# EAGLE board RedBoard-Artemis-Panel (EAGLE 9.4.2), part 1 of 4
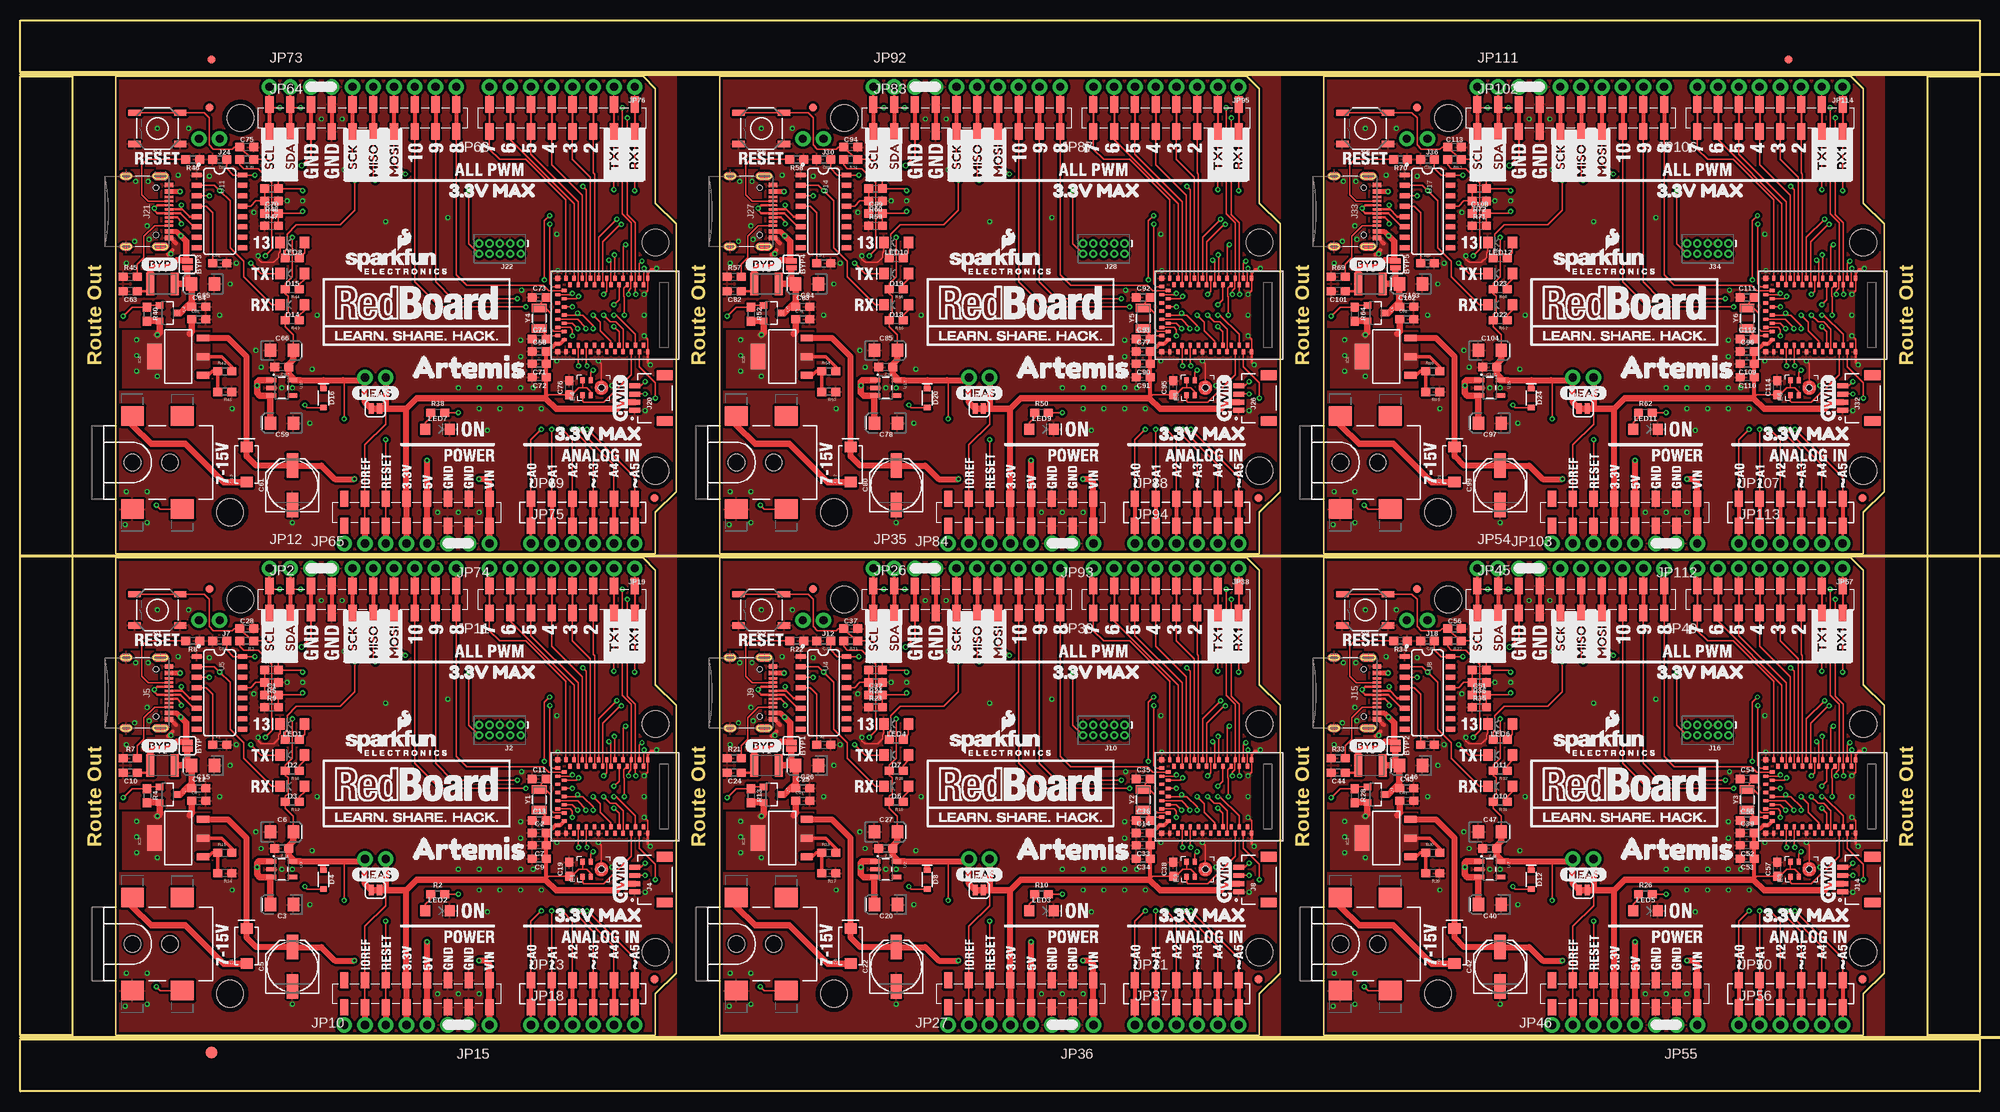
[diagram p0: board, top side]
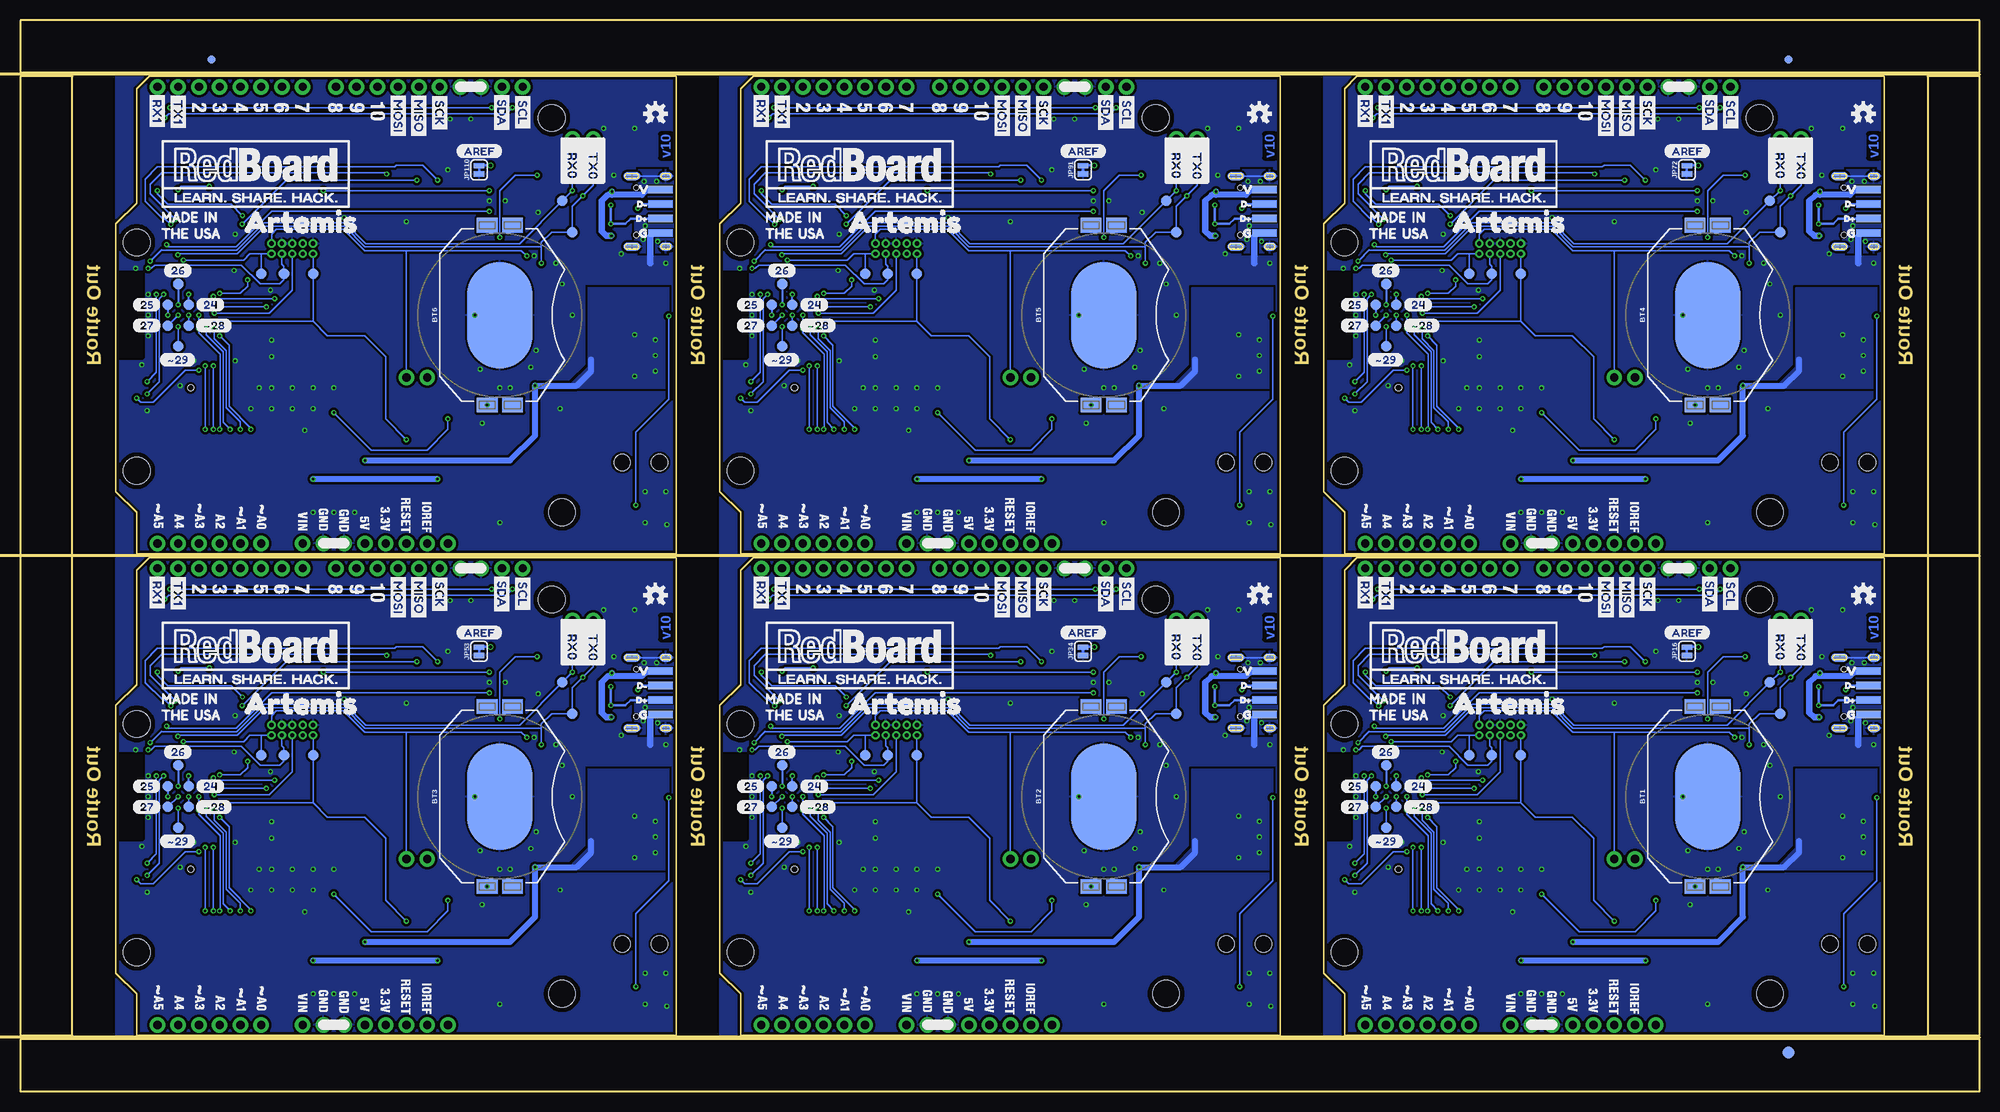
[diagram p1: board, bottom side, seen from below]

Size 239.78 x 131.06 mm. Coordinates in mm from the lower left corner, seen from the top.
Outline: 11.68,65.28 76.2,65.28 77.72,63.75 77.72,49.78 80.26,47.24 80.26,14.48 77.72,11.94 77.72,6.86 11.68,6.86 11.68,65.28
Outline: 85.6,65.28 150.11,65.28 151.64,63.75 151.64,49.78 154.18,47.24 154.18,14.48 151.64,11.94 151.64,6.86 85.6,6.86 85.6,65.28
Outline: 159.51,65.28 224.03,65.28 225.55,63.75 225.55,49.78 228.09,47.24 228.09,14.48 225.55,11.94 225.55,6.86 159.51,6.86 159.51,65.28
Outline: 11.68,124.21 76.2,124.21 77.72,122.68 77.72,108.71 80.26,106.17 80.26,73.41 77.72,70.87 77.72,65.79 11.68,65.79 11.68,124.21
Outline: 85.6,124.21 150.11,124.21 151.64,122.68 151.64,108.71 154.18,106.17 154.18,73.41 151.64,70.87 151.64,65.79 85.6,65.79 85.6,124.21
Outline: 159.51,124.21 224.03,124.21 225.55,122.68 225.55,108.71 228.09,106.17 228.09,73.41 225.55,70.87 225.55,65.79 159.51,65.79 159.51,124.21
Outline: 0,6.35 239.78,6.35 239.78,0 0,0 0,6.35
Outline: 233.43,124.21 239.78,124.21 239.78,6.86 233.43,6.86 233.43,124.21
Outline: 0,131.06 239.78,131.06 239.78,124.71 0,124.71 0,131.06
Outline: 0,124.21 6.35,124.21 6.35,6.86 0,6.86 0,124.21
Copper layers (1*16): Top 0.035mm / dielectric 1.5mm / Bottom 0.035mm
Design rules "SparkFun-2-layer-PCBWay-LIMIT": minimum track width 6mil, minimum drill 0.3mm, track to track 6mil, track to pad 6mil, pad to pad 6mil, via to via 6mil, smd to smd 6mil, copper to edge 6mil, drill to drill 6mil, minimum pad ring 6mil, minimum via ring 6mil, stop-mask expansion 4mil, vias tented up to drill 25mil, thermal gap 10mil
Net classes: 0 default: width 0 mm, drill 0 mm; 1 power: width 0.762 mm
tRestrict: area 77.1,31 to 80.3,41.1; area 151,31 to 154.2,41.1; area 224.9,31 to 228.1,41.1; area 77.1,89.9 to 80.3,100.1; area 151,89.9 to 154.2,100.1; area 224.9,89.9 to 228.1,100.1
bRestrict: area 77.1,31 to 80.3,41.1; area 151,31 to 154.2,41.1; area 224.9,31 to 228.1,41.1; area 77.1,89.9 to 80.3,100.1; area 151,89.9 to 154.2,100.1; area 224.9,89.9 to 228.1,100.1
vRestrict: area 12.3,29.2 to 13.7,37.5; area 17.4,30 to 19,37.5; area 59.6,17.7 to 60.2,18.2; area 62.1,17.5 to 62.6,18.4; area 23,36.2 to 24.4,38.5; area 11.9,19.8 to 21.1,31.9; area 86.2,29.2 to 87.6,37.5; area 91.3,30 to 93,37.5; area 133.5,17.7 to 134.1,18.2; area 136,17.5 to 136.5,18.4; area 96.9,36.2 to 98.3,38.5; area 85.9,19.8 to 95,31.9; area 160.1,29.2 to 161.5,37.5; area 165.2,30 to 166.9,37.5; area 207.4,17.7 to 208,18.2; area 209.9,17.5 to 210.4,18.4; area 170.8,36.2 to 172.2,38.5; area 159.8,19.8 to 168.9,31.9; area 12.3,88.1 to 13.7,96.4; area 17.4,88.9 to 19,96.4; area 59.6,76.6 to 60.2,77.1; area 62.1,76.5 to 62.6,77.3; area 23,95.1 to 24.4,97.4; area 11.9,78.7 to 21.1,90.8; area 86.2,88.1 to 87.6,96.4; area 91.3,88.9 to 93,96.4; area 133.5,76.6 to 134.1,77.1; area 136,76.5 to 136.5,77.3; area 96.9,95.1 to 98.3,97.4; area 85.9,78.7 to 95,90.8; area 160.1,88.1 to 161.5,96.4; area 165.2,88.9 to 166.9,96.4; area 207.4,76.6 to 208,77.1; area 209.9,76.5 to 210.4,77.3; area 170.8,95.1 to 172.2,97.4; area 159.8,78.7 to 168.9,90.8
Milling: 3 lines

## Footprints (pad centres in the part's own frame; a part is rotated, then mirrored left to right if it is on the bottom)
BATTCON_20MM_4LEGS_OVERPASTE = smd 1.778 x 2.54: 1 -11,1.55; 3 11,1.55; P$1 -11,-1.55; P$2 11,-1.55 | smd 13 x 8: 2 0,0
SMT-JUMPER_2_NO_SILK = smd 0.635 x 1.27: 1 -0.406,0; 2 0.406,0
0603 = smd 1.1 x 1: 1 -0.85,0; 2 0.85,0
EIA3216 = smd 1.4 x 1.6: + 1.4,0; - -1.4,0
PANASONIC_D = smd 3 x 1.4: + 2.4,0; - -2.4,0
SMA-DIODE = smd 1.27 x 1.47: A -2.15,0; C 2.15,0
LED-1206 = smd 1.2 x 1.4: A -1.5,0; C 1.5,0
SOD-323 = smd 0.63 x 0.83: A 1.15,0; C -1.15,0
SPH0641LM4H-1_MICROPHONE = smd 0.725 x 0.522: 1 -0.9,1.3; 2 -0.9,0.3; 4 0.9,0.3; 5 0.9,1.3 | smd 0.5 x 0.2: 3 0,-1.65; 8 0,-0.35 | smd 0.2 x 0.5: 6 -0.65,-1; 7 0.65,-1 | hole 0.8: 0,-1
FIDUCIAL-1X2 = smd 1 x 1: 1 0,0
FIDUCIAL-1.5X3 = smd 1.5 x 1.5: 1 0,0
1210 = smd 1 x 2.8: 1 -1.5,0; 2 1.5,0
SOT223-ALT1 = smd 0.838 x 1.524: 1 -2.271,-3.02; 2 0,-3.02; 3 2.288,-3.02 | smd 3.124 x 1.778: 4 0,2.921
1X02_NO_SILK = drill 1.016 pad 1.88: 1 0,0; 2 2.54,0
2X5-PTH-1.27MM-NO_SILK = drill 0.508 pad 1: 1 -2.54,-0.635; 2 -2.54,0.635; 3 -1.27,-0.635; 4 -1.27,0.635; 5 0,-0.635; 6 0,0.635; 7 1.27,-0.635; 8 1.27,0.635; 9 2.54,-0.635; 10 2.54,0.635
POWER_JACK_SMD_OVERPASTE_TOE = smd 2.8 x 2.4: GND 0,-5.7; P$4 6.1,-5.7; VIN0 0,5.7; VIN1 6.1,5.7 | hole 2.032: 0,0; 4.572,0
JST04_1MM_RA = smd 0.6 x 1.35: 1 -1.5,0; 2 -0.5,0; 3 0.5,0; 4 1.5,0 | smd 1.2 x 2: NC1 2.8,-3.675; NC2 -2.8,-3.675
USB-C-16P = smd 0.3 x 1.016: A5 -1.25,0.154; A6 -0.25,0.154; A7 0.25,0.154; A8 1.25,0.154; B5 1.75,0.154; B6 0.75,0.154; B7 -0.75,0.154; B8 -1.75,0.154 | smd 0.6 x 1.016: GND -3.225,0.154; GND2 3.225,0.154 | smd 1 x 2.1: SHLD1 -4.32,-0.915; SHLD2 4.32,-0.915 | smd 1 x 2.1 bottom: SHLD3 -4.32,-0.915; SHLD4 4.32,-0.915 | smd 1 x 1.6: SHLD5 -4.32,-5.095; SHLD8 4.32,-5.095 | smd 1 x 1.6 bottom: SHLD6 -4.32,-5.095; SHLD7 4.32,-5.095 | smd 0.55 x 1.016: VBUS1 -2.45,0.154; VBUS2 2.45,0.154 | hole 0.65: -2.89,-1.445; 2.89,-1.445
1X10_SMD_COMBINED = smd 1 x 2: 1A 0,1.65; 1B 0,-1.65; 2A 2.54,1.65; 2B 2.54,-1.65; 3A 5.08,1.65; 3B 5.08,-1.65; 4A 7.62,1.65; 4B 7.62,-1.65; 5A 10.16,1.65; 5B 10.16,-1.65; 6A 12.7,1.65; 6B 12.7,-1.65; 7A 15.24,1.65; 7B 15.24,-1.65; 8A 17.78,1.65; 8B 17.78,-1.65; 9A 20.32,1.65; 9B 20.32,-1.65; 10A 22.86,1.65; 10B 22.86,-1.65
STAND-OFF = hole 3.302: 0,0
1X08_SMD_COMBINED_NC = smd 1 x 2: 1 -17.78,1.65; 1@2 -17.78,-1.65; 2 -15.24,-1.65; 2@2 -15.24,1.65; 3 -12.7,1.65; 3@2 -12.7,-1.65; 4 -10.16,-1.65; 4@2 -10.16,1.65; 5 -7.62,1.65; 5@2 -7.62,-1.65; 6 -5.08,-1.65; 6@2 -5.08,1.65; 7 -2.54,1.65; 7@2 -2.54,-1.65; 8 0,-1.65; 8@2 0,1.65
1X10_NO_SILK = drill 1.016 pad 1.88: 1 0,0; 2 2.54,0; 3 5.08,0; 4 7.62,0; 5 10.16,0; 6 12.7,0; 7 15.24,0; 8 17.78,0; 9 20.32,0; 10 22.86,0
1X06_SMD_STRAIGHT_COMBO = smd 1 x 2: 1A 0,-1.65; 1B 0,1.65; 2A 2.54,1.65; 2B 2.54,-1.65; 3A 5.08,-1.65; 3B 5.08,1.65; 4A 7.62,1.65; 4B 7.62,-1.65; 5A 10.16,-1.65; 5B 10.16,1.65; 6A 12.7,1.65; 6B 12.7,-1.65
USB-SOLDER-PADS = smd 3 x 0.9: D+ 0,-0.889; D- 0,0.889; GND 0,-2.667; VBUS 0,2.667
1X08_NO_SILK@1 = drill 1.016 pad 1.88: 1 0,0; 2 2.54,0; 3 5.08,0; 4 7.62,0; 5 10.16,0; 6 12.7,0; 7 15.24,0; 8 17.78,0
SMT-JUMPER_2_NC_TRACE_SILK = smd 0.635 x 1.27: 1 -0.508,0; 2 0.508,0
1X06_NO_SILK@1 = drill 1.016 pad 1.88: 1 0,0; 2 2.54,0; 3 5.08,0; 4 7.62,0; 5 10.16,0; 6 12.7,0
1X08_NO_SILK = drill 1.016 pad 1.88: 1 0,0; 2 2.54,0; 3 5.08,0; 4 7.62,0; 5 10.16,0; 6 12.7,0; 7 15.24,0; 8 17.78,0
SOT23-3 = smd 0.8 x 0.9: 1 -0.95,-1; 2 0.95,-1; 3 0,1.1
TACTILE_SWITCH_SMD_5.2MM = smd 1.524 x 0.762: 1 -2.794,1.905; 2 2.794,1.905; 3 -2.794,-1.905; 4 2.794,-1.905
PAD.03X.05 = smd 1.27 x 1.27: P$1 0,0
ARTEMIS_FP = smd 0.4 x 0.6: AD16 -4,-3.7; BOOT 1.5,4.5; D0 0.5,-4.5; D1 -0.5,-4.5; D2 -1,-3.7; D3 2,-3.7; D7 -1.5,4.5; D8 -0.5,4.5; D9 2,3.7; D10 1,3.7; D14 -5,3.7; D17 -3.5,-4.5; D36 2.5,-4.5; D38 3,-3.7; D40 2.5,4.5; D41 -2.5,-4.5; GND@1 4.5,4.5; GND@39 -5.5,-4.5; GND@47 -1.5,-4.5; GND@59 4.5,-4.5; RXI-0 3.5,4.5; SWDCK 4,3.7; SWDIO 0,3.7; TXO-0 0.5,4.5; ~AD31 -3,-3.7; ~AD35 -2,3.7; ~D4 -2.5,4.5; ~D5 -1,3.7; ~D18 -4.5,-4.5; ~D19 -5,-3.7; ~D22 -3.5,4.5; ~D23 -4,3.7; ~D24 -3,3.7; ~D27 -4.5,4.5; ~D28 -5.5,4.5; ~D37 3.5,-4.5; ~D39 3,3.7; ~D42 1.5,-4.5; ~D43 1,-3.7; ~D44 4,-3.7; ~D45 -2,-3.7; ~RST 0,-3.7 | smd 0.6 x 0.4: AD34 -6.5,-0.5; D15 -6.5,0.5; VDD@36 -5.7,-3; VDD@37 -6.5,-3.5; XI -6.5,-2.5; XO -5.7,-2; ~AD11 -5.7,-1; ~AD12 -5.7,2; ~AD13 -5.7,1; ~AD29 -6.5,-1.5; ~AD32 -5.7,3; ~AD33/SWO -5.7,0; ~D6 -6.5,3.5; ~D25 -6.5,2.5; ~D26 -6.5,1.5 | smd 0.6 x 0.6: GND@22 -6.5,4.5; GND@38 -6.5,-4.5
SOT23-5 = smd 0.55 x 1.2: 1 -0.95,-1.3; 2 0,-1.3; 3 0.95,-1.3; 4 0.95,1.3; 5 -0.95,1.3
SO016 = smd 0.6 x 1.2: 1 -4.445,-2.8; 2 -3.175,-2.8; 3 -1.905,-2.8; 4 -0.635,-2.8; 5 0.635,-2.8; 6 1.905,-2.8; 7 3.175,-2.8; 8 4.445,-2.8; 9 4.445,2.8; 10 3.175,2.8; 11 1.905,2.8; 12 0.635,2.8; 13 -0.635,2.8; 14 -1.905,2.8; 15 -3.175,2.8; 16 -4.445,2.8
CRYSTAL-SMD-3.2X1.5MM = smd 1 x 1.8: P$1 -1.25,0; P$2 1.25,0

## Placement (x,y rotation side)
BT1  CR2032  [BATTCON_20MM_4LEGS_OVERPASTE]  33.27,36.07 90 bottom
BT2  CR2032  [BATTCON_20MM_4LEGS_OVERPASTE]  107.19,36.07 90 bottom
BT3  CR2032  [BATTCON_20MM_4LEGS_OVERPASTE]  181.1,36.07 90 bottom
BT4  CR2032  [BATTCON_20MM_4LEGS_OVERPASTE]  33.27,95 90 bottom
BT5  CR2032  [BATTCON_20MM_4LEGS_OVERPASTE]  107.19,95 90 bottom
BT6  CR2032  [BATTCON_20MM_4LEGS_OVERPASTE]  181.1,95 90 bottom
BYP  [SMT-JUMPER_2_NO_SILK]  20.45,42.29 270 top
BYP1  [SMT-JUMPER_2_NO_SILK]  94.36,42.29 270 top
BYP2  [SMT-JUMPER_2_NO_SILK]  168.28,42.29 270 top
BYP3  [SMT-JUMPER_2_NO_SILK]  20.45,101.22 270 top
BYP4  [SMT-JUMPER_2_NO_SILK]  94.36,101.22 270 top
BYP5  [SMT-JUMPER_2_NO_SILK]  168.28,101.22 270 top
C1  0.1uF  [0603]  30.73,48.51 0 top
C2  0.1uF  [0603]  63.5,31.62 0 top
C3  10uF  [EIA3216]  32,22.86 180 top
C4  0.1uF  [0603]  21.84,35.56 0 top
C5  47uF  [PANASONIC_D]  33.27,15.24 90 top
C6  10uF  [EIA3216]  32,31.75 0 top
C7  10uF  [0603]  63.5,30.1 180 top
C8  0.1uF  [0603]  30.73,51.56 0 top
C9  1.0uF  [0603]  63.5,28.45 180 top
C10  0.1uF  [0603]  13.46,38.99 180 top
C11  15pF  [0603]  63.5,38.23 0 top
C12  0.1uF  [0603]  21.84,37.08 0 top
C13  15pF  [0603]  63.5,33.15 0 top
C14  0.1uF  [0603]  137.41,31.62 0 top
C15  10uF  [EIA3216]  22.35,39.88 180 top
C16  1.0uF  [0603]  32,29.72 180 top
C17  10nF  [0603]  24.38,42.42 0 top
C18  0.1uF  [0603]  24.38,55.12 180 top
C19  0.1uF  [0603]  67.18,27.18 90 top
C20  10uF  [EIA3216]  105.92,22.86 180 top
C21  0.1uF  [0603]  95.76,35.56 0 top
C22  47uF  [PANASONIC_D]  107.19,15.24 90 top
C23  0.1uF  [0603]  104.65,51.56 0 top
C24  0.1uF  [0603]  87.38,38.99 180 top
C25  0.1uF  [0603]  95.76,37.08 0 top
C26  10uF  [EIA3216]  96.27,39.88 180 top
C27  10uF  [EIA3216]  105.92,31.75 0 top
C28  1nF  [0603]  27.69,56.64 0 top
C29  1.0uF  [0603]  105.92,29.72 180 top
C30  10nF  [0603]  98.3,42.42 0 top
C31  0.1uF  [0603]  98.3,55.12 180 top
C32  0.1uF  [0603]  104.65,48.51 0 top
C33  10uF  [0603]  137.41,30.1 180 top
C34  1.0uF  [0603]  137.41,28.45 180 top
C35  15pF  [0603]  137.41,38.23 0 top
C36  15pF  [0603]  137.41,33.15 0 top
C37  1nF  [0603]  101.6,56.64 0 top
C38  0.1uF  [0603]  141.1,27.18 90 top
C39  0.1uF  [0603]  211.33,31.62 0 top
C40  10uF  [EIA3216]  179.83,22.86 180 top
C41  0.1uF  [0603]  169.67,35.56 0 top
C42  47uF  [PANASONIC_D]  181.1,15.24 90 top
C43  0.1uF  [0603]  178.56,51.56 0 top
C44  0.1uF  [0603]  161.29,38.99 180 top
C45  0.1uF  [0603]  169.67,37.08 0 top
C46  10uF  [EIA3216]  170.18,39.88 180 top
C47  10uF  [EIA3216]  179.83,31.75 0 top
C48  1.0uF  [0603]  179.83,29.72 180 top
C49  10nF  [0603]  172.21,42.42 0 top
C50  0.1uF  [0603]  172.21,55.12 180 top
C51  0.1uF  [0603]  178.56,48.51 0 top
C52  10uF  [0603]  211.33,30.1 180 top
C53  1.0uF  [0603]  211.33,28.45 180 top
C54  15pF  [0603]  211.33,38.23 0 top
C55  15pF  [0603]  211.33,33.15 0 top
C56  1nF  [0603]  175.51,56.64 0 top
C57  0.1uF  [0603]  215.01,27.18 90 top
C58  0.1uF  [0603]  63.5,90.55 0 top
C59  10uF  [EIA3216]  32,81.79 180 top
C60  0.1uF  [0603]  21.84,94.49 0 top
C61  47uF  [PANASONIC_D]  33.27,74.17 90 top
C62  0.1uF  [0603]  30.73,110.49 0 top
C63  0.1uF  [0603]  13.46,97.92 180 top
C64  0.1uF  [0603]  21.84,96.01 0 top
C65  10uF  [EIA3216]  22.35,98.81 180 top
C66  10uF  [EIA3216]  32,90.68 0 top
C67  1.0uF  [0603]  32,88.65 180 top
C68  10nF  [0603]  24.38,101.35 0 top
C69  0.1uF  [0603]  24.38,114.05 180 top
C70  0.1uF  [0603]  30.73,107.44 0 top
C71  10uF  [0603]  63.5,89.03 180 top
C72  1.0uF  [0603]  63.5,87.38 180 top
C73  15pF  [0603]  63.5,97.16 0 top
C74  15pF  [0603]  63.5,92.08 0 top
C75  1nF  [0603]  27.69,115.57 0 top
C76  0.1uF  [0603]  67.18,86.11 90 top
C77  0.1uF  [0603]  137.41,90.55 0 top
C78  10uF  [EIA3216]  105.92,81.79 180 top
C79  0.1uF  [0603]  95.76,94.49 0 top
C80  47uF  [PANASONIC_D]  107.19,74.17 90 top
C81  0.1uF  [0603]  104.65,110.49 0 top
C82  0.1uF  [0603]  87.38,97.92 180 top
C83  0.1uF  [0603]  95.76,96.01 0 top
C84  10uF  [EIA3216]  96.27,98.81 180 top
C85  10uF  [EIA3216]  105.92,90.68 0 top
C86  1.0uF  [0603]  105.92,88.65 180 top
C87  10nF  [0603]  98.3,101.35 0 top
C88  0.1uF  [0603]  98.3,114.05 180 top
C89  0.1uF  [0603]  104.65,107.44 0 top
C90  10uF  [0603]  137.41,89.03 180 top
C91  1.0uF  [0603]  137.41,87.38 180 top
C92  15pF  [0603]  137.41,97.16 0 top
C93  15pF  [0603]  137.41,92.08 0 top
C94  1nF  [0603]  101.6,115.57 0 top
C95  0.1uF  [0603]  141.1,86.11 90 top
C96  0.1uF  [0603]  211.33,90.55 0 top
C97  10uF  [EIA3216]  179.83,81.79 180 top
C98  0.1uF  [0603]  169.67,94.49 0 top
C99  47uF  [PANASONIC_D]  181.1,74.17 90 top
C100  0.1uF  [0603]  178.56,110.49 0 top
C101  0.1uF  [0603]  161.29,97.92 180 top
C102  0.1uF  [0603]  169.67,96.01 0 top
C103  10uF  [EIA3216]  170.18,98.81 180 top
C104  10uF  [EIA3216]  179.83,90.68 0 top
C105  1.0uF  [0603]  179.83,88.65 180 top
C106  10nF  [0603]  172.21,101.35 0 top
C107  0.1uF  [0603]  172.21,114.05 180 top
C108  0.1uF  [0603]  178.56,107.44 0 top
C109  10uF  [0603]  211.33,89.03 180 top
C110  1.0uF  [0603]  211.33,87.38 180 top
C111  15pF  [0603]  211.33,97.16 0 top
C112  15pF  [0603]  211.33,92.08 0 top
C113  1nF  [0603]  175.51,115.57 0 top
C114  0.1uF  [0603]  215.01,86.11 90 top
D1  1A/40V/500mV  [SMA-DIODE]  27.69,17.78 90 top
D2  GREEN  [LED-1206]  33.27,41.15 180 top
D3  Yellow  [LED-1206]  33.27,37.34 180 top
D4  3A/10V/280mV  [SOD-323]  37.08,25.91 270 top
D5  1A/40V/500mV  [SMA-DIODE]  101.6,17.78 90 top
D6  Yellow  [LED-1206]  107.19,37.34 180 top
D7  GREEN  [LED-1206]  107.19,41.15 180 top
D8  3A/10V/280mV  [SOD-323]  111,25.91 270 top
D9  1A/40V/500mV  [SMA-DIODE]  175.51,17.78 90 top
D10  Yellow  [LED-1206]  181.1,37.34 180 top
D11  GREEN  [LED-1206]  181.1,41.15 180 top
D12  3A/10V/280mV  [SOD-323]  184.91,25.91 270 top
D13  1A/40V/500mV  [SMA-DIODE]  27.69,76.71 90 top
D14  Yellow  [LED-1206]  33.27,96.27 180 top
D15  GREEN  [LED-1206]  33.27,100.08 180 top
D16  3A/10V/280mV  [SOD-323]  37.08,84.84 270 top
D17  1A/40V/500mV  [SMA-DIODE]  101.6,76.71 90 top
D18  Yellow  [LED-1206]  107.19,96.27 180 top
D19  GREEN  [LED-1206]  107.19,100.08 180 top
D20  3A/10V/280mV  [SOD-323]  111,84.84 270 top
D21  1A/40V/500mV  [SMA-DIODE]  175.51,76.71 90 top
D22  Yellow  [LED-1206]  181.1,96.27 180 top
D23  GREEN  [LED-1206]  181.1,100.08 180 top
D24  3A/10V/280mV  [SOD-323]  184.91,84.84 270 top
E1  SPH0641LM4H-1  [SPH0641LM4H-1_MICROPHONE]  70.1,27.18 90 top
E2  SPH0641LM4H-1  [SPH0641LM4H-1_MICROPHONE]  144.02,27.18 90 top
E3  SPH0641LM4H-1  [SPH0641LM4H-1_MICROPHONE]  217.93,27.18 90 top
E4  SPH0641LM4H-1  [SPH0641LM4H-1_MICROPHONE]  70.1,86.11 90 top
E5  SPH0641LM4H-1  [SPH0641LM4H-1_MICROPHONE]  144.02,86.11 90 top
E6  SPH0641LM4H-1  [SPH0641LM4H-1_MICROPHONE]  217.93,86.11 90 top
E$1  [FIDUCIAL-1X2]  23.37,126.3 0 top
E$2  [FIDUCIAL-1X2]  23.37,126.3 0 bottom
E$3  [FIDUCIAL-1X2]  216.41,126.3 0 top
E$4  [FIDUCIAL-1X2]  216.41,126.3 0 bottom
E$5  [FIDUCIAL-1.5X3]  23.37,4.76 0 top
E$6  [FIDUCIAL-1.5X3]  23.37,4.76 0 bottom
F1  6V/2A  [1210]  91.31,39.88 0 top
F2  6V/2A  [1210]  17.4,39.88 0 top
F3  6V/2A  [1210]  165.23,39.88 0 top
F4  6V/2A  [1210]  17.4,98.81 0 top
F5  6V/2A  [1210]  91.31,98.81 0 top
F6  6V/2A  [1210]  165.23,98.81 0 top
FRAME1  FRAME-LETTERNO_PACKAGE  [DUMMY]  122.43,30.99 270 bottom
FRAME2  FRAME-LETTERNO_PACKAGE  [DUMMY]  48.51,30.99 270 bottom
FRAME3  FRAME-LETTERNO_PACKAGE  [DUMMY]  196.34,30.99 270 bottom
FRAME4  FRAME-LETTERNO_PACKAGE  [DUMMY]  48.51,89.92 270 bottom
FRAME5  FRAME-LETTERNO_PACKAGE  [DUMMY]  122.43,89.92 270 bottom
FRAME6  FRAME-LETTERNO_PACKAGE  [DUMMY]  196.34,89.92 270 bottom
IC1  LM1117  [SOT223-ALT1]  93.22,30.99 90 top
IC2  LM1117  [SOT223-ALT1]  167.13,30.99 90 top
IC3  LM1117  [SOT223-ALT1]  19.3,30.99 90 top
IC4  LM1117  [SOT223-ALT1]  19.3,89.92 90 top
IC5  LM1117  [SOT223-ALT1]  93.22,89.92 90 top
IC6  LM1117  [SOT223-ALT1]  167.13,89.92 90 top
J1  [1X02_NO_SILK]  44.7,28.45 180 top
J2  CORTEX_DEBUG  [2X5-PTH-1.27MM-NO_SILK]  58.67,44.2 180 top
J3  POWER_JACKTOE  [POWER_JACK_SMD_OVERPASTE_TOE]  13.72,18.03 0 top
J4  [JST04_1MM_RA]  75.18,25.91 90 top
J5  USB-C  [USB-C-16P]  18.03,48.77 270 top
J6  POWER_JACKTOE  [POWER_JACK_SMD_OVERPASTE_TOE]  87.63,18.03 0 top
J7  [1X02_NO_SILK]  24.38,57.66 180 top
J8  [JST04_1MM_RA]  149.1,25.91 90 top
J9  USB-C  [USB-C-16P]  91.95,48.77 270 top
J10  CORTEX_DEBUG  [2X5-PTH-1.27MM-NO_SILK]  132.59,44.2 180 top
J11  [1X02_NO_SILK]  118.62,28.45 180 top
J12  [1X02_NO_SILK]  98.3,57.66 180 top
J13  POWER_JACKTOE  [POWER_JACK_SMD_OVERPASTE_TOE]  161.54,18.03 0 top
J14  [JST04_1MM_RA]  223.01,25.91 90 top
J15  USB-C  [USB-C-16P]  165.86,48.77 270 top
J16  CORTEX_DEBUG  [2X5-PTH-1.27MM-NO_SILK]  206.5,44.2 180 top
J17  [1X02_NO_SILK]  192.53,28.45 180 top
J18  [1X02_NO_SILK]  172.21,57.66 180 top
J19  POWER_JACKTOE  [POWER_JACK_SMD_OVERPASTE_TOE]  13.72,76.96 0 top
J20  [JST04_1MM_RA]  75.18,84.84 90 top
J21  USB-C  [USB-C-16P]  18.03,107.7 270 top
J22  CORTEX_DEBUG  [2X5-PTH-1.27MM-NO_SILK]  58.67,103.12 180 top
J23  [1X02_NO_SILK]  44.7,87.38 180 top
J24  [1X02_NO_SILK]  24.38,116.59 180 top
J25  POWER_JACKTOE  [POWER_JACK_SMD_OVERPASTE_TOE]  87.63,76.96 0 top
J26  [JST04_1MM_RA]  149.1,84.84 90 top
J27  USB-C  [USB-C-16P]  91.95,107.7 270 top
J28  CORTEX_DEBUG  [2X5-PTH-1.27MM-NO_SILK]  132.59,103.12 180 top
J29  [1X02_NO_SILK]  118.62,87.38 180 top
J30  [1X02_NO_SILK]  98.3,116.59 180 top
J31  POWER_JACKTOE  [POWER_JACK_SMD_OVERPASTE_TOE]  161.54,76.96 0 top
J32  [JST04_1MM_RA]  223.01,84.84 90 top
J33  USB-C  [USB-C-16P]  165.86,107.7 270 top
J34  CORTEX_DEBUG  [2X5-PTH-1.27MM-NO_SILK]  206.5,103.12 180 top
J35  [1X02_NO_SILK]  192.53,87.38 180 top
J36  [1X02_NO_SILK]  172.21,116.59 180 top
JP1  SFE_LOGO_NAME.1_INCH  [SFE_LOGO_NAME_.1]  45.34,42.8 0 top
JP2  M10SMD_COMBO  [1X10_SMD_COMBINED]  30.48,60.2 0 top
JP3  STAND-OFF  [STAND-OFF]  25.65,11.94 0 top
JP4  STAND-OFF  [STAND-OFF]  77.72,17.02 0 top
JP5  STAND-OFF  [STAND-OFF]  77.72,44.96 0 top
JP6  STAND-OFF  [STAND-OFF]  26.92,60.2 0 top
JP7  SFE_LOGO_FLAME.1_INCH  [SFE_LOGO_FLAME_.1]  46.99,45.34 0 top
JP8  FIDUCIAL1X2  [FIDUCIAL-1X2]  77.6,13.72 0 top
JP9  FIDUCIAL1X2  [FIDUCIAL-1X2]  23.11,61.47 0 top
JP10  [1X08_SMD_COMBINED_NC]  39.62,11.94 180 top
JP11  JP11  [1X08_SMD_COMBINED_NC]  57.4,60.2 180 top
JP12  M10NO_SILK  [1X10_NO_SILK]  30.48,64.01 0 top
JP13  [1X06_SMD_STRAIGHT_COMBO]  62.48,11.94 0 top
JP14  USB_SOLDER_PADS  [USB-SOLDER-PADS]  13.59,48.77 0 bottom
JP15  [1X08_NO_SILK@1]  57.4,8.13 180 top
JP16  [SMT-JUMPER_2_NC_TRACE_SILK]  35.81,53.85 90 bottom
JP17  MEAS  [SMT-JUMPER_2_NC_TRACE_SILK]  43.43,24.64 0 top
JP18  [1X06_NO_SILK@1]  62.48,8.13 0 top
JP19  [1X08_NO_SILK]  75.18,64.01 180 top
JP20  STAND-OFF  [STAND-OFF]  99.57,11.94 0 top
JP21  STAND-OFF  [STAND-OFF]  151.64,17.02 0 top
JP22  STAND-OFF  [STAND-OFF]  151.64,44.96 0 top
JP23  STAND-OFF  [STAND-OFF]  100.84,60.2 0 top
JP24  FIDUCIAL1X2  [FIDUCIAL-1X2]  151.51,13.72 0 top
JP25  FIDUCIAL1X2  [FIDUCIAL-1X2]  97.03,61.47 0 top
JP26  M10SMD_COMBO  [1X10_SMD_COMBINED]  104.39,60.2 0 top
JP27  [1X08_SMD_COMBINED_NC]  113.54,11.94 180 top
JP28  SFE_LOGO_NAME.1_INCH  [SFE_LOGO_NAME_.1]  119.25,42.8 0 top
JP29  SFE_LOGO_FLAME.1_INCH  [SFE_LOGO_FLAME_.1]  120.9,45.34 0 top
JP30  JP11  [1X08_SMD_COMBINED_NC]  131.32,60.2 180 top
JP31  [1X06_SMD_STRAIGHT_COMBO]  136.4,11.94 0 top
JP32  USB_SOLDER_PADS  [USB-SOLDER-PADS]  87.5,48.77 0 bottom
JP33  MEAS  [SMT-JUMPER_2_NC_TRACE_SILK]  117.35,24.64 0 top
JP34  [SMT-JUMPER_2_NC_TRACE_SILK]  109.73,53.85 90 bottom
JP35  M10NO_SILK  [1X10_NO_SILK]  104.39,64.01 0 top
JP36  [1X08_NO_SILK@1]  131.32,8.13 180 top
JP37  [1X06_NO_SILK@1]  136.4,8.13 0 top
JP38  [1X08_NO_SILK]  149.1,64.01 180 top
JP39  STAND-OFF  [STAND-OFF]  173.48,11.94 0 top
JP40  STAND-OFF  [STAND-OFF]  225.55,17.02 0 top
JP41  STAND-OFF  [STAND-OFF]  225.55,44.96 0 top
JP42  STAND-OFF  [STAND-OFF]  174.75,60.2 0 top
JP43  FIDUCIAL1X2  [FIDUCIAL-1X2]  225.43,13.72 0 top
JP44  FIDUCIAL1X2  [FIDUCIAL-1X2]  170.94,61.47 0 top
JP45  M10SMD_COMBO  [1X10_SMD_COMBINED]  178.31,60.2 0 top
JP46  [1X08_SMD_COMBINED_NC]  187.45,11.94 180 top
JP47  SFE_LOGO_NAME.1_INCH  [SFE_LOGO_NAME_.1]  193.17,42.8 0 top
JP48  SFE_LOGO_FLAME.1_INCH  [SFE_LOGO_FLAME_.1]  194.82,45.34 0 top
JP49  JP11  [1X08_SMD_COMBINED_NC]  205.23,60.2 180 top
JP50  [1X06_SMD_STRAIGHT_COMBO]  210.31,11.94 0 top
JP51  USB_SOLDER_PADS  [USB-SOLDER-PADS]  161.42,48.77 0 bottom
JP52  MEAS  [SMT-JUMPER_2_NC_TRACE_SILK]  191.26,24.64 0 top
JP53  [SMT-JUMPER_2_NC_TRACE_SILK]  183.64,53.85 90 bottom
JP54  M10NO_SILK  [1X10_NO_SILK]  178.31,64.01 0 top
JP55  [1X08_NO_SILK@1]  205.23,8.13 180 top
JP56  [1X06_NO_SILK@1]  210.31,8.13 0 top
JP57  [1X08_NO_SILK]  223.01,64.01 180 top
JP58  STAND-OFF  [STAND-OFF]  25.65,70.87 0 top
JP59  STAND-OFF  [STAND-OFF]  77.72,75.95 0 top
JP60  STAND-OFF  [STAND-OFF]  77.72,103.89 0 top
JP61  STAND-OFF  [STAND-OFF]  26.92,119.13 0 top
JP62  FIDUCIAL1X2  [FIDUCIAL-1X2]  77.6,72.64 0 top
JP63  FIDUCIAL1X2  [FIDUCIAL-1X2]  23.11,120.4 0 top
JP64  M10SMD_COMBO  [1X10_SMD_COMBINED]  30.48,119.13 0 top
JP65  [1X08_SMD_COMBINED_NC]  39.62,70.87 180 top
JP66  SFE_LOGO_NAME.1_INCH  [SFE_LOGO_NAME_.1]  45.34,101.73 0 top
JP67  SFE_LOGO_FLAME.1_INCH  [SFE_LOGO_FLAME_.1]  46.99,104.27 0 top
JP68  JP11  [1X08_SMD_COMBINED_NC]  57.4,119.13 180 top
JP69  [1X06_SMD_STRAIGHT_COMBO]  62.48,70.87 0 top
JP70  USB_SOLDER_PADS  [USB-SOLDER-PADS]  13.59,107.7 0 bottom
JP71  MEAS  [SMT-JUMPER_2_NC_TRACE_SILK]  43.43,83.57 0 top
JP72  [SMT-JUMPER_2_NC_TRACE_SILK]  35.81,112.78 90 bottom
JP73  M10NO_SILK  [1X10_NO_SILK]  30.48,122.94 0 top
JP74  [1X08_NO_SILK@1]  57.4,67.06 180 top
JP75  [1X06_NO_SILK@1]  62.48,67.06 0 top
JP76  [1X08_NO_SILK]  75.18,122.94 180 top
JP77  STAND-OFF  [STAND-OFF]  99.57,70.87 0 top
JP78  STAND-OFF  [STAND-OFF]  151.64,75.95 0 top
JP79  STAND-OFF  [STAND-OFF]  151.64,103.89 0 top
JP80  STAND-OFF  [STAND-OFF]  100.84,119.13 0 top
JP81  FIDUCIAL1X2  [FIDUCIAL-1X2]  151.51,72.64 0 top
JP82  FIDUCIAL1X2  [FIDUCIAL-1X2]  97.03,120.4 0 top
JP83  M10SMD_COMBO  [1X10_SMD_COMBINED]  104.39,119.13 0 top
JP84  [1X08_SMD_COMBINED_NC]  113.54,70.87 180 top
JP85  SFE_LOGO_NAME.1_INCH  [SFE_LOGO_NAME_.1]  119.25,101.73 0 top
JP86  SFE_LOGO_FLAME.1_INCH  [SFE_LOGO_FLAME_.1]  120.9,104.27 0 top
JP87  JP11  [1X08_SMD_COMBINED_NC]  131.32,119.13 180 top
JP88  [1X06_SMD_STRAIGHT_COMBO]  136.4,70.87 0 top
JP89  USB_SOLDER_PADS  [USB-SOLDER-PADS]  87.5,107.7 0 bottom
JP90  MEAS  [SMT-JUMPER_2_NC_TRACE_SILK]  117.35,83.57 0 top
JP91  [SMT-JUMPER_2_NC_TRACE_SILK]  109.73,112.78 90 bottom
JP92  M10NO_SILK  [1X10_NO_SILK]  104.39,122.94 0 top
JP93  [1X08_NO_SILK@1]  131.32,67.06 180 top
JP94  [1X06_NO_SILK@1]  136.4,67.06 0 top
JP95  [1X08_NO_SILK]  149.1,122.94 180 top
JP96  STAND-OFF  [STAND-OFF]  173.48,70.87 0 top
JP97  STAND-OFF  [STAND-OFF]  225.55,75.95 0 top
JP98  STAND-OFF  [STAND-OFF]  225.55,103.89 0 top
JP99  STAND-OFF  [STAND-OFF]  174.75,119.13 0 top
JP100  FIDUCIAL1X2  [FIDUCIAL-1X2]  225.43,72.64 0 top
JP101  FIDUCIAL1X2  [FIDUCIAL-1X2]  170.94,120.4 0 top
JP102  M10SMD_COMBO  [1X10_SMD_COMBINED]  178.31,119.13 0 top
JP103  [1X08_SMD_COMBINED_NC]  187.45,70.87 180 top
JP104  SFE_LOGO_NAME.1_INCH  [SFE_LOGO_NAME_.1]  193.17,101.73 0 top
JP105  SFE_LOGO_FLAME.1_INCH  [SFE_LOGO_FLAME_.1]  194.82,104.27 0 top
JP106  JP11  [1X08_SMD_COMBINED_NC]  205.23,119.13 180 top
JP107  [1X06_SMD_STRAIGHT_COMBO]  210.31,70.87 0 top
JP108  USB_SOLDER_PADS  [USB-SOLDER-PADS]  161.42,107.7 0 bottom
JP109  MEAS  [SMT-JUMPER_2_NC_TRACE_SILK]  191.26,83.57 0 top
JP110  [SMT-JUMPER_2_NC_TRACE_SILK]  183.64,112.78 90 bottom
JP111  M10NO_SILK  [1X10_NO_SILK]  178.31,122.94 0 top
JP112  [1X08_NO_SILK@1]  205.23,67.06 180 top
JP113  [1X06_NO_SILK@1]  210.31,67.06 0 top
JP114  [1X08_NO_SILK]  223.01,122.94 180 top
LED1  BLUE  [LED-1206]  33.27,44.96 180 top
LED2  GREEN  [LED-1206]  51.05,22.1 0 top
LED3  GREEN  [LED-1206]  124.97,22.1 0 top
LED4  BLUE  [LED-1206]  107.19,44.96 180 top
LED5  GREEN  [LED-1206]  198.88,22.1 0 top
LED6  BLUE  [LED-1206]  181.1,44.96 180 top
LED7  GREEN  [LED-1206]  51.05,81.03 0 top
LED8  BLUE  [LED-1206]  33.27,103.89 180 top
LED9  GREEN  [LED-1206]  124.97,81.03 0 top
LED10  BLUE  [LED-1206]  107.19,103.89 180 top
LED11  GREEN  [LED-1206]  198.88,81.03 0 top
LED12  BLUE  [LED-1206]  181.1,103.89 180 top
Q1  2.5A/30V/105mΩ  [SOT23-3]  18.03,36.32 270 top
Q2  2.5A/30V/105mΩ  [SOT23-3]  91.95,36.32 270 top
Q3  2.5A/30V/105mΩ  [SOT23-3]  165.86,36.32 270 top
Q4  2.5A/30V/105mΩ  [SOT23-3]  18.03,95.25 270 top
Q5  2.5A/30V/105mΩ  [SOT23-3]  91.95,95.25 270 top
Q6  2.5A/30V/105mΩ  [SOT23-3]  165.86,95.25 270 top
R1  4.7k  [0603]  33.27,43.05 0 top
R2  10k  [0603]  51.05,24.13 0 top
R3  100k  [0603]  27.69,55.12 180 top
R4  10k  [0603]  15.49,36.2 270 top
R5  [0603]  30.73,50.04 180 top
R6  4.7k  [0603]  107.19,43.05 0 top
R7  5.1k  [0603]  13.46,40.77 0 top
R8  5.1k  [0603]  21.08,55.12 180 top
R9  220k  [0603]  30.73,46.99 0 top
R10  10k  [0603]  124.97,24.13 0 top
R11  100k  [0603]  101.6,55.12 180 top
R12  4.7k  [0603]  33.27,35.43 180 top
R13  10k  [0603]  89.41,36.2 270 top
R14  715  [0603]  25.02,26.67 180 top
R15  240  [0603]  25.02,29.21 0 top
R16  4.7k  [0603]  33.27,39.24 180 top
R17  715  [0603]  98.93,26.67 180 top
R18  240  [0603]  98.93,29.21 0 top
R19  4.7k  [0603]  107.19,35.43 180 top
R20  4.7k  [0603]  107.19,39.24 180 top
R21  5.1k  [0603]  87.38,40.77 0 top
R22  5.1k  [0603]  95,55.12 180 top
R23  220k  [0603]  104.65,46.99 0 top
R24  [0603]  104.65,50.04 180 top
R25  4.7k  [0603]  181.1,43.05 0 top
R26  10k  [0603]  198.88,24.13 0 top
R27  100k  [0603]  175.51,55.12 180 top
R28  10k  [0603]  163.32,36.2 270 top
R29  715  [0603]  172.85,26.67 180 top
R30  240  [0603]  172.85,29.21 0 top
R31  4.7k  [0603]  181.1,35.43 180 top
R32  4.7k  [0603]  181.1,39.24 180 top
R33  5.1k  [0603]  161.29,40.77 0 top
R34  5.1k  [0603]  168.91,55.12 180 top
R35  220k  [0603]  178.56,46.99 0 top
R36  [0603]  178.56,50.04 180 top
R37  4.7k  [0603]  33.27,101.98 0 top
R38  10k  [0603]  51.05,83.06 0 top
R39  100k  [0603]  27.69,114.05 180 top
R40  10k  [0603]  15.49,95.12 270 top
R41  715  [0603]  25.02,85.6 180 top
R42  240  [0603]  25.02,88.14 0 top
R43  4.7k  [0603]  33.27,94.36 180 top
R44  4.7k  [0603]  33.27,98.17 180 top
R45  5.1k  [0603]  13.46,99.7 0 top
R46  5.1k  [0603]  21.08,114.05 180 top
R47  220k  [0603]  30.73,105.92 0 top
R48  [0603]  30.73,108.97 180 top
R49  4.7k  [0603]  107.19,101.98 0 top
R50  10k  [0603]  124.97,83.06 0 top
R51  100k  [0603]  101.6,114.05 180 top
R52  10k  [0603]  89.41,95.12 270 top
R53  715  [0603]  98.93,85.6 180 top
R54  240  [0603]  98.93,88.14 0 top
R55  4.7k  [0603]  107.19,94.36 180 top
R56  4.7k  [0603]  107.19,98.17 180 top
R57  5.1k  [0603]  87.38,99.7 0 top
R58  5.1k  [0603]  95,114.05 180 top
R59  220k  [0603]  104.65,105.92 0 top
R60  [0603]  104.65,108.97 180 top
R61  4.7k  [0603]  181.1,101.98 0 top
R62  10k  [0603]  198.88,83.06 0 top
R63  100k  [0603]  175.51,114.05 180 top
R64  10k  [0603]  163.32,95.12 270 top
R65  715  [0603]  172.85,85.6 180 top
R66  240  [0603]  172.85,88.14 0 top
R67  4.7k  [0603]  181.1,94.36 180 top
R68  4.7k  [0603]  181.1,98.17 180 top
R69  5.1k  [0603]  161.29,99.7 0 top
R70  5.1k  [0603]  168.91,114.05 180 top
R71  220k  [0603]  178.56,105.92 0 top
R72  [0603]  178.56,108.97 180 top
S1  [TACTILE_SWITCH_SMD_5.2MM]  16.76,58.93 180 top
S2  [TACTILE_SWITCH_SMD_5.2MM]  90.68,58.93 180 top
S3  [TACTILE_SWITCH_SMD_5.2MM]  164.59,58.93 180 top
S4  [TACTILE_SWITCH_SMD_5.2MM]  16.76,117.86 180 top
S5  [TACTILE_SWITCH_SMD_5.2MM]  90.68,117.86 180 top
S6  [TACTILE_SWITCH_SMD_5.2MM]  164.59,117.86 180 top
TP1  [PAD.03X.05]  59.69,41.15 90 bottom
TP2  [PAD.03X.05]  62.48,41.15 90 bottom
TP3  [PAD.03X.05]  56.13,41.15 0 bottom
TP4  [PAD.03X.05]  133.6,41.15 90 bottom
TP5  TEST-POINT3X5  [PAD.03X.05]  25.65,50.04 90 bottom
TP6  TEST-POINT3X5  [PAD.03X.05]  24.38,46.23 90 bottom
TP7  [PAD.03X.05]  136.4,41.15 90 bottom
TP8  [PAD.03X.05]  72.64,32.26 270 bottom
TP9  [PAD.03X.05]  71.37,34.8 270 bottom
TP10  TEST-POINT3X5  [PAD.03X.05]  99.57,50.04 90 bottom
TP11  [PAD.03X.05]  73.91,34.8 0 bottom
TP12  [PAD.03X.05]  71.37,37.34 0 bottom
TP13  [PAD.03X.05]  73.91,37.34 0 bottom
TP14  [PAD.03X.05]  72.64,39.88 0 bottom
TP15  TEST-POINT3X5  [PAD.03X.05]  98.3,46.23 90 bottom
TP16  [PAD.03X.05]  130.05,41.15 0 bottom
TP17  [PAD.03X.05]  146.56,32.26 270 bottom
TP18  [PAD.03X.05]  145.29,34.8 270 bottom
TP19  [PAD.03X.05]  147.83,34.8 0 bottom
TP20  [PAD.03X.05]  145.29,37.34 0 bottom
TP21  [PAD.03X.05]  147.83,37.34 0 bottom
TP22  [PAD.03X.05]  146.56,39.88 0 bottom
TP23  [PAD.03X.05]  207.52,41.15 90 bottom
TP24  [PAD.03X.05]  210.31,41.15 90 bottom
TP25  TEST-POINT3X5  [PAD.03X.05]  173.48,50.04 90 bottom
TP26  TEST-POINT3X5  [PAD.03X.05]  172.21,46.23 90 bottom
TP27  [PAD.03X.05]  203.96,41.15 0 bottom
TP28  [PAD.03X.05]  220.47,32.26 270 bottom
TP29  [PAD.03X.05]  219.2,34.8 270 bottom
TP30  [PAD.03X.05]  221.74,34.8 0 bottom
TP31  [PAD.03X.05]  219.2,37.34 0 bottom
TP32  [PAD.03X.05]  221.74,37.34 0 bottom
TP33  [PAD.03X.05]  220.47,39.88 0 bottom
TP34  [PAD.03X.05]  59.69,100.08 90 bottom
TP35  [PAD.03X.05]  62.48,100.08 90 bottom
TP36  TEST-POINT3X5  [PAD.03X.05]  25.65,108.97 90 bottom
TP37  TEST-POINT3X5  [PAD.03X.05]  24.38,105.16 90 bottom
TP38  [PAD.03X.05]  56.13,100.08 0 bottom
TP39  [PAD.03X.05]  72.64,91.19 270 bottom
TP40  [PAD.03X.05]  71.37,93.73 270 bottom
TP41  [PAD.03X.05]  73.91,93.73 0 bottom
TP42  [PAD.03X.05]  71.37,96.27 0 bottom
TP43  [PAD.03X.05]  73.91,96.27 0 bottom
TP44  [PAD.03X.05]  72.64,98.81 0 bottom
TP45  [PAD.03X.05]  133.6,100.08 90 bottom
TP46  [PAD.03X.05]  136.4,100.08 90 bottom
TP47  TEST-POINT3X5  [PAD.03X.05]  99.57,108.97 90 bottom
TP48  TEST-POINT3X5  [PAD.03X.05]  98.3,105.16 90 bottom
TP49  [PAD.03X.05]  130.05,100.08 0 bottom
TP50  [PAD.03X.05]  146.56,91.19 270 bottom
TP51  [PAD.03X.05]  145.29,93.73 270 bottom
TP52  [PAD.03X.05]  147.83,93.73 0 bottom
TP53  [PAD.03X.05]  145.29,96.27 0 bottom
TP54  [PAD.03X.05]  147.83,96.27 0 bottom
TP55  [PAD.03X.05]  146.56,98.81 0 bottom
TP56  [PAD.03X.05]  207.52,100.08 90 bottom
TP57  [PAD.03X.05]  210.31,100.08 90 bottom
TP58  TEST-POINT3X5  [PAD.03X.05]  173.48,108.97 90 bottom
TP59  TEST-POINT3X5  [PAD.03X.05]  172.21,105.16 90 bottom
TP60  [PAD.03X.05]  203.96,100.08 0 bottom
TP61  [PAD.03X.05]  220.47,91.19 270 bottom
TP62  [PAD.03X.05]  219.2,93.73 270 bottom
TP63  [PAD.03X.05]  221.74,93.73 0 bottom
TP64  [PAD.03X.05]  219.2,96.27 0 bottom
TP65  [PAD.03X.05]  221.74,96.27 0 bottom
TP66  [PAD.03X.05]  220.47,98.81 0 bottom
U1  ARTEMIS_MODULESMD  [ARTEMIS_FP]  72.26,36.07 0 top
U2  AP2112-3.3V  [SOT23-5]  105.92,27.18 270 top
U3  AP2112-3.3V  [SOT23-5]  32,27.18 270 top
U4  CH340C  [SO016]  98.3,48.77 270 top
U5  CH340C  [SO016]  24.38,48.77 270 top
U6  ARTEMIS_MODULESMD  [ARTEMIS_FP]  146.18,36.07 0 top
U7  AP2112-3.3V  [SOT23-5]  179.83,27.18 270 top
U8  CH340C  [SO016]  172.21,48.77 270 top
U9  ARTEMIS_MODULESMD  [ARTEMIS_FP]  220.09,36.07 0 top
U10  AP2112-3.3V  [SOT23-5]  32,86.11 270 top
U11  CH340C  [SO016]  24.38,107.7 270 top
U12  ARTEMIS_MODULESMD  [ARTEMIS_FP]  72.26,95 0 top
U13  AP2112-3.3V  [SOT23-5]  105.92,86.11 270 top
U14  CH340C  [SO016]  98.3,107.7 270 top
U15  ARTEMIS_MODULESMD  [ARTEMIS_FP]  146.18,95 0 top
U16  AP2112-3.3V  [SOT23-5]  179.83,86.11 270 top
U17  CH340C  [SO016]  172.21,107.7 270 top
U18  ARTEMIS_MODULESMD  [ARTEMIS_FP]  220.09,95 0 top
U$1  [SCL1]  30.48,63.37 270 bottom
U$2  [D#3]  17.27,47.88 0 bottom
U$3  [SDA0]  33.02,63.5 270 bottom
U$4  [MADEINUSA#PNG]  71.12,46.99 0 bottom
U$5  OSHW-LOGOS  [OSHW-LOGO-S]  88.14,60.71 0 bottom
U$6  [MADEINUSA#PNG]  145.03,46.99 0 bottom
U$7  [QWIIC_COPYRIGHT_SMALL]  147.32,25.91 90 top
U$8  [G1]  91.06,46.1 0 bottom
U$9  [QWIIC_COPYRIGHT_SMALL]  73.41,25.91 90 top
U$10  [D#4]  17.14,49.66 0 bottom
U$11  [G1]  17.14,46.1 0 bottom
U$12  [V0]  17.14,51.43 0 bottom
U$13  [3#3V_MAX2]  64.01,21.59 0 top
U$14  [ARTEMIS0]  45.72,29.72 0 top
U$15  [ARTEMIS0]  66.8,47.5 0 bottom
U$16  OSHW-LOGOS  [OSHW-LOGO-S]  14.22,60.71 0 bottom
U$17  [#284]  70.48,34.8 0 bottom
U$18  [SCL1]  30.48,52.83 90 top
U$19  [#295]  74.93,30.61 0 bottom
U$20  [AREF2]  38.61,56.13 0 bottom
U$21  [240]  70.48,37.34 0 bottom
U$22  [SDA0]  33.02,52.83 90 top
U$23  [251]  78.23,37.34 0 bottom
U$24  [262]  74.42,41.53 0 bottom
U$25  [273]  78.23,34.8 0 bottom
U$26  [SCK9]  40.64,63.37 270 bottom
U$27  [MISO8]  43.18,63.5 270 bottom
U$28  [MOSI7]  45.72,63.5 270 bottom
U$29  [TX10]  72.64,63.5 270 bottom
U$30  [RX11]  75.18,63.5 270 bottom
U$31  [V0]  91.06,51.43 0 bottom
U$32  [D#3]  91.19,47.88 0 bottom
U$33  [D#4]  91.06,49.66 0 bottom
U$34  [ARTEMIS0]  119.63,29.72 0 top
U$35  [ARTEMIS0]  140.72,47.5 0 bottom
U$36  [MISO8]  117.09,51.94 90 top
U$37  [MOSI7]  119.63,51.94 90 top
U$38  [SCK9]  114.55,52.83 90 top
U$39  [3#3V_MAX2]  124.97,51.31 0 top
U$40  [MEAS3]  114.43,26.54 0 top
U$41  [RX11]  148.97,52.83 90 top
U$42  [TX10]  146.56,52.7 90 top
U$43  [RX01]  98.3,57.02 270 bottom
U$44  [TX00]  95.76,57.02 270 bottom
U$45  [AREF2]  112.52,56.13 0 bottom
U$46  [SCL1]  104.39,52.83 90 top
U$47  [MISO8]  43.18,51.94 90 top
U$48  [MOSI7]  45.72,51.94 90 top
U$49  [RX01]  24.38,57.02 270 bottom
U$50  [SCK9]  40.64,52.83 90 top
U$51  [SDA0]  106.93,52.83 90 top
U$52  [BYP0]  88.65,42.29 0 top
U$53  [TX00]  21.84,57.02 270 bottom
U$54  [3#3V_MAX2]  137.92,21.59 0 top
U$55  [#284]  144.4,34.8 0 bottom
U$56  [#295]  148.84,30.61 0 bottom
U$57  [240]  144.4,37.34 0 bottom
U$58  [251]  152.15,37.34 0 bottom
U$59  [262]  148.34,41.53 0 bottom
U$60  [273]  152.15,34.8 0 bottom
U$61  [SCL1]  104.39,63.37 270 bottom
U$62  [SDA0]  106.93,63.5 270 bottom
U$63  [SCK9]  114.55,63.37 270 bottom
U$64  [MISO8]  117.09,63.5 270 bottom
U$65  [MOSI7]  119.63,63.5 270 bottom
U$66  [TX10]  146.56,63.5 270 bottom
U$67  [3#3V_MAX2]  51.05,51.31 0 top
U$68  [BYP0]  14.73,42.29 0 top
U$69  [RX11]  149.1,63.5 270 bottom
U$70  [MEAS3]  40.51,26.54 0 top
U$71  [RX11]  75.06,52.83 90 top
U$72  [TX10]  72.64,52.7 90 top
U$73  OSHW-LOGOS  [OSHW-LOGO-S]  162.05,60.71 0 bottom
U$74  [MADEINUSA#PNG]  218.95,46.99 0 bottom
U$75  [QWIIC_COPYRIGHT_SMALL]  221.23,25.91 90 top
U$76  [G1]  164.97,46.1 0 bottom
U$77  [V0]  164.97,51.43 0 bottom
U$78  [D#3]  165.1,47.88 0 bottom
U$79  [D#4]  164.97,49.66 0 bottom
U$80  [ARTEMIS0]  193.55,29.72 0 top
U$81  [ARTEMIS0]  214.63,47.5 0 bottom
U$82  [MISO8]  191.01,51.94 90 top
U$83  [MOSI7]  193.55,51.94 90 top
U$84  [SCK9]  188.47,52.83 90 top
U$85  [3#3V_MAX2]  198.88,51.31 0 top
U$86  [MEAS3]  188.34,26.54 0 top
U$87  [RX11]  222.88,52.83 90 top
U$88  [TX10]  220.47,52.7 90 top
U$89  [RX01]  172.21,57.02 270 bottom
U$90  [TX00]  169.67,57.02 270 bottom
U$91  [AREF2]  186.44,56.13 0 bottom
U$92  [SCL1]  178.31,52.83 90 top
U$93  [SDA0]  180.85,52.83 90 top
U$94  [BYP0]  162.56,42.29 0 top
U$95  [3#3V_MAX2]  211.84,21.59 0 top
U$96  [#284]  218.31,34.8 0 bottom
U$97  [#295]  222.76,30.61 0 bottom
U$98  [240]  218.31,37.34 0 bottom
U$99  [251]  226.06,37.34 0 bottom
U$100  [262]  222.25,41.53 0 bottom
U$101  [273]  226.06,34.8 0 bottom
U$102  [SCL1]  178.31,63.37 270 bottom
U$103  [SDA0]  180.85,63.5 270 bottom
U$104  [SCK9]  188.47,63.37 270 bottom
U$105  [MISO8]  191.01,63.5 270 bottom
U$106  [MOSI7]  193.55,63.5 270 bottom
U$107  [TX10]  220.47,63.5 270 bottom
U$108  [RX11]  223.01,63.5 270 bottom
U$109  OSHW-LOGOS  [OSHW-LOGO-S]  14.22,119.63 0 bottom
U$110  [MADEINUSA#PNG]  71.12,105.92 0 bottom
U$111  [QWIIC_COPYRIGHT_SMALL]  73.41,84.84 90 top
U$112  [G1]  17.14,105.03 0 bottom
U$113  [V0]  17.14,110.36 0 bottom
U$114  [D#3]  17.27,106.81 0 bottom
U$115  [D#4]  17.14,108.59 0 bottom
U$116  [ARTEMIS0]  45.72,88.65 0 top
U$117  [ARTEMIS0]  66.8,106.43 0 bottom
U$118  [MISO8]  43.18,110.87 90 top
U$119  [MOSI7]  45.72,110.87 90 top
U$120  [SCK9]  40.64,111.76 90 top
U$121  [3#3V_MAX2]  51.05,110.24 0 top
U$122  [MEAS3]  40.51,85.47 0 top
U$123  [RX11]  75.06,111.76 90 top
U$124  [TX10]  72.64,111.63 90 top
U$125  [RX01]  24.38,115.95 270 bottom
U$126  [TX00]  21.84,115.95 270 bottom
U$127  [AREF2]  38.61,115.06 0 bottom
U$128  [SCL1]  30.48,111.76 90 top
U$129  [SDA0]  33.02,111.76 90 top
U$130  [BYP0]  14.73,101.22 0 top
U$131  [3#3V_MAX2]  64.01,80.52 0 top
U$132  [#284]  70.48,93.73 0 bottom
U$133  [#295]  74.93,89.54 0 bottom
U$134  [240]  70.48,96.27 0 bottom
U$135  [251]  78.23,96.27 0 bottom
U$136  [262]  74.42,100.46 0 bottom
U$137  [273]  78.23,93.73 0 bottom
U$138  [SCL1]  30.48,122.3 270 bottom
U$139  [SDA0]  33.02,122.43 270 bottom
U$140  [SCK9]  40.64,122.3 270 bottom
U$141  [MISO8]  43.18,122.43 270 bottom
U$142  [MOSI7]  45.72,122.43 270 bottom
U$143  [TX10]  72.64,122.43 270 bottom
U$144  [RX11]  75.18,122.43 270 bottom
U$145  OSHW-LOGOS  [OSHW-LOGO-S]  88.14,119.63 0 bottom
U$146  [MADEINUSA#PNG]  145.03,105.92 0 bottom
U$147  [QWIIC_COPYRIGHT_SMALL]  147.32,84.84 90 top
U$148  [G1]  91.06,105.03 0 bottom
U$149  [V0]  91.06,110.36 0 bottom
U$150  [D#3]  91.19,106.81 0 bottom
U$151  [D#4]  91.06,108.59 0 bottom
U$152  [ARTEMIS0]  119.63,88.65 0 top
U$153  [ARTEMIS0]  140.72,106.43 0 bottom
U$154  [MISO8]  117.09,110.87 90 top
U$155  [MOSI7]  119.63,110.87 90 top
U$156  [SCK9]  114.55,111.76 90 top
U$157  [3#3V_MAX2]  124.97,110.24 0 top
U$158  [MEAS3]  114.43,85.47 0 top
U$159  [RX11]  148.97,111.76 90 top
U$160  [TX10]  146.56,111.63 90 top
U$161  [RX01]  98.3,115.95 270 bottom
U$162  [TX00]  95.76,115.95 270 bottom
U$163  [AREF2]  112.52,115.06 0 bottom
U$164  [SCL1]  104.39,111.76 90 top
U$165  [SDA0]  106.93,111.76 90 top
U$166  [BYP0]  88.65,101.22 0 top
U$167  [3#3V_MAX2]  137.92,80.52 0 top
U$168  [#284]  144.4,93.73 0 bottom
U$169  [#295]  148.84,89.54 0 bottom
U$170  [240]  144.4,96.27 0 bottom
U$171  [251]  152.15,96.27 0 bottom
U$172  [262]  148.34,100.46 0 bottom
U$173  [273]  152.15,93.73 0 bottom
U$174  [SCL1]  104.39,122.3 270 bottom
U$175  [SDA0]  106.93,122.43 270 bottom
U$176  [SCK9]  114.55,122.3 270 bottom
U$177  [MISO8]  117.09,122.43 270 bottom
U$178  [MOSI7]  119.63,122.43 270 bottom
U$179  [TX10]  146.56,122.43 270 bottom
U$180  [RX11]  149.1,122.43 270 bottom
U$181  OSHW-LOGOS  [OSHW-LOGO-S]  162.05,119.63 0 bottom
U$182  [MADEINUSA#PNG]  218.95,105.92 0 bottom
U$183  [QWIIC_COPYRIGHT_SMALL]  221.23,84.84 90 top
U$184  [G1]  164.97,105.03 0 bottom
U$185  [V0]  164.97,110.36 0 bottom
U$186  [D#3]  165.1,106.81 0 bottom
U$187  [D#4]  164.97,108.59 0 bottom
U$188  [ARTEMIS0]  193.55,88.65 0 top
U$189  [ARTEMIS0]  214.63,106.43 0 bottom
U$190  [MISO8]  191.01,110.87 90 top
U$191  [MOSI7]  193.55,110.87 90 top
U$192  [SCK9]  188.47,111.76 90 top
U$193  [3#3V_MAX2]  198.88,110.24 0 top
U$194  [MEAS3]  188.34,85.47 0 top
U$195  [RX11]  222.88,111.76 90 top
U$196  [TX10]  220.47,111.63 90 top
U$197  [RX01]  172.21,115.95 270 bottom
U$198  [TX00]  169.67,115.95 270 bottom
U$199  [AREF2]  186.44,115.06 0 bottom
U$200  [SCL1]  178.31,111.76 90 top
U$201  [SDA0]  180.85,111.76 90 top
U$202  [BYP0]  162.56,101.22 0 top
U$203  [3#3V_MAX2]  211.84,80.52 0 top
U$204  [#284]  218.31,93.73 0 bottom
U$205  [#295]  222.76,89.54 0 bottom
U$206  [240]  218.31,96.27 0 bottom
U$207  [251]  226.06,96.27 0 bottom
U$208  [262]  222.25,100.46 0 bottom
U$209  [273]  226.06,93.73 0 bottom
U$210  [SCL1]  178.31,122.3 270 bottom
U$211  [SDA0]  180.85,122.43 270 bottom
U$212  [SCK9]  188.47,122.3 270 bottom
U$213  [MISO8]  191.01,122.43 270 bottom
U$214  [MOSI7]  193.55,122.43 270 bottom
U$215  [TX10]  220.47,122.43 270 bottom
U$216  [RX11]  223.01,122.43 270 bottom
Y1  32.768kHz  [CRYSTAL-SMD-3.2X1.5MM]  63.5,35.69 90 top
Y2  32.768kHz  [CRYSTAL-SMD-3.2X1.5MM]  137.41,35.69 90 top
Y3  32.768kHz  [CRYSTAL-SMD-3.2X1.5MM]  211.33,35.69 90 top
Y4  32.768kHz  [CRYSTAL-SMD-3.2X1.5MM]  63.5,94.62 90 top
Y5  32.768kHz  [CRYSTAL-SMD-3.2X1.5MM]  137.41,94.62 90 top
Y6  32.768kHz  [CRYSTAL-SMD-3.2X1.5MM]  211.33,94.62 90 top

## Library data of the parts
BT1-BT6 = SparkFun-Batteries; PROD_ID: PRT-11892; SF_SKU: BATT-10373
BYP BYP1-BYP5 JP16 JP17 JP33 JP34 JP52 JP53 JP71 JP72 JP90 JP91 JP109 JP110 = SparkFun-Jumpers
C1 C8 C23 C32 C43 C51 C62 C70 C81 C89 C100 C108 = SparkFun-Capacitors; PROD_ID: CAP-08604
C2 C4 C10 C12 C14 C18 C19 C21 C24 C25 C31 C38 C39 C41 C44 C45 C50 C57 C58 C60 C63 C64 C69 C76 C77 C79 C82 C83 C88 C95 C96 C98 C101 C102 C107 C114 = SparkFun-Capacitors; PROD_ID: CAP-00810
C3 C6 C15 C20 C26 C27 C40 C46 C47 C59 C65 C66 C78 C84 C85 C97 C103 C104 = SparkFun-Capacitors; PROD_ID: CAP-00811
C5 C22 C42 C61 C80 C99 = SparkFun-Capacitors; PROD_ID: CAP-08478
C7 C33 C52 C71 C90 C109 = SparkFun-Capacitors; PROD_ID: CAP-11015
C9 C16 C29 C34 C48 C53 C67 C72 C86 C91 C105 C110 = SparkFun-Capacitors; PROD_ID: CAP-00868
C11 C13 C35 C36 C54 C55 C73 C74 C92 C93 C111 C112 = SparkFun-Capacitors; PROD_ID: CAP-07881
C17 C30 C49 C68 C87 C106 = SparkFun-Capacitors; PROD_ID: CAP-00867
C28 C37 C56 C75 C94 C113 = SparkFun-Capacitors; PROD_ID: CAP-07886
D1 D5 D9 D13 D17 D21 = SparkFun-DiscreteSemi; PROD_ID: DIO-08053
D2 D7 D11 D15 D19 D23 LED2 LED3 LED5 LED7 LED9 LED11 = SparkFun-LED; PROD_ID: DIO-09910
D3 D6 D10 D14 D18 D22 = SparkFun-LED; PROD_ID: DIO-09909
D4 D8 D12 D16 D20 D24 = SparkFun-DiscreteSemi; PROD_ID: DIO-14072
E1-E6 = SparkFun-Sensors; PROD_ID: IC-14361
E$1-E$4 JP1 JP7 JP28 JP29 JP47 JP48 JP66 JP67 JP85 JP86 JP104 JP105 U$5 U$16 U$73 U$109 U$145 U$181 = SparkFun-Aesthetics
E$5 E$6 = SparkFun-Retired
F1-F6 = SparkFun-Fuses; PROD_ID: RES-14313
FRAME1-FRAME6 = SparkFun-Aesthetics; DESIGNER: Nobody; VERSION: v01
IC1-IC6 = Testing; PROD_ID: VREG-08170
J1 J2 J7 J10-J12 J16-J18 J22-J24 J28-J30 J34-J36 JP14 JP32 JP51 JP70 JP89 JP108 TP1-TP66 = SparkFun-Connectors
J3 J6 J13 J19 J25 J31 = SparkFun-Connectors; PROD_ID: CONN-08106; SF_ID: PRT-12748
J4 J8 J14 J20 J26 J32 = SparkFun-Connectors; PROD_ID: CONN-13694
J5 J9 J15 J21 J27 J33 = SparkFun-Connectors; PROD_ID: CONN-14122
JP2 JP12 JP26 JP35 JP45 JP54 JP64 JP73 JP83 JP92 JP102 JP111 = SparkFun-Connectors; PROD_ID: CONN-11219
JP3-JP6 JP8 JP9 JP20-JP25 JP39-JP44 JP58-JP63 JP77-JP82 JP96-JP101 = SparkFun
JP10 JP11 JP15 JP27 JP30 JP36 JP46 JP49 JP55 JP65 JP68 JP74 JP84 JP87 JP93 JP103 JP106 JP112 = SparkFun-Connectors; PROD_ID: CONN-10204
JP13 JP18 JP31 JP37 JP50 JP56 JP69 JP75 JP88 JP94 JP107 JP113 = SparkFun-Connectors; PROD_ID: CONN-10203
JP19 JP38 JP57 JP76 JP95 JP114 = SparkFun-Connectors; PROD_ID: CONN-08438
LED1 LED4 LED6 LED8 LED10 LED12 = SparkFun-LED; PROD_ID: DIO-09911
Q1-Q6 = SparkFun-DiscreteSemi; PROD_ID: TRANS-11308
R1 R6 R12 R16 R19 R20 R25 R31 R32 R37 R43 R44 R49 R55 R56 R61 R67 R68 = SparkFun-Resistors; PROD_ID: RES-07857
R2 R4 R10 R13 R26 R28 R38 R40 R50 R52 R62 R64 = SparkFun-Resistors; PROD_ID: RES-00824
R3 R11 R27 R39 R51 R63 = SparkFun-Resistors; PROD_ID: RES-07828
R5 R24 R36 R48 R60 R72 = SparkFun-Resistors
R7 R8 R21 R22 R33 R34 R45 R46 R57 R58 R69 R70 = SparkFun-Resistors; PROD_ID: RES-12083
R9 R23 R35 R47 R59 R71 = SparkFun-Resistors; PROD_ID: RES-08969
R14 R17 R29 R41 R53 R65 = SparkFun-Resistors; PROD_ID: RES-07850
R15 R18 R30 R42 R54 R66 = SparkFun-Resistors; PROD_ID: RES-07849
S1-S6 = SparkFun-Switches; PROD_ID: SWCH-14139
U1 U6 U9 U12 U15 U18 = SparkFun-IC-Microcontroller; PROD_ID: SUB-14415
U2 U3 U7 U10 U13 U16 = SparkFun-PowerIC; PROD_ID: VREG-12457
U4 U5 U8 U11 U14 U17 = SparkFun-IC-Comms; PROD_ID: IC-14038
U$1 U$3 U$18 U$22 U$46 U$51 U$61 U$62 U$92 U$93 U$102 U$103 U$128 U$129 U$138 U$139 U$164 U$165 U$174 U$175 U$200 U$201 U$210 U$211 = buzzard_labels (6)
U$2 U$10 U$32 U$33 U$78 U$79 U$114 U$115 U$150 U$151 U$186 U$187 = buzzard_labels (14)
U$4 U$6 U$74 U$110 U$146 U$182 = madeinusa
U$7 U$9 U$75 U$111 U$147 U$183 = Labels
U$8 U$11 U$12 U$31 U$52 U$68 U$76 U$77 U$94 U$112 U$113 U$130 U$148 U$149 U$166 U$184 U$185 U$202 = buzzard_labels (13)
U$13 U$17 U$19 U$21 U$23-U$25 U$29 U$30 U$39-U$42 U$54-U$60 U$66 U$67 U$69-U$72 U$85-U$88 U$95-U$101 U$107 U$108 U$121-U$124 U$131-U$137 U$143 U$144 U$157-U$160 U$167-U$173 U$179 U$180 U$193-U$196 U$203-U$209 U$215 U$216 = buzzard_labels (2)
U$14 U$15 U$34 U$35 U$43 U$44 U$49 U$53 U$80 U$81 U$89 U$90 U$116 U$117 U$125 U$126 U$152 U$153 U$161 U$162 U$188 U$189 U$197 U$198 = buzzard_labels (3)
U$20 U$45 U$91 U$127 U$163 U$199 = buzzard_labels (5)
U$26-U$28 U$36-U$38 U$47 U$48 U$50 U$63-U$65 U$82-U$84 U$104-U$106 U$118-U$120 U$140-U$142 U$154-U$156 U$176-U$178 U$190-U$192 U$212-U$214 = buzzard_labels (8)
Y1-Y6 = SparkFun-Clocks; PROD_ID: XTAL-13062